# Altium PCB 333.PcbDoc (part 3 of 4)
Units mil, origin at the board's own origin, x right, y up, seen from the top; angles counter-clockwise.
Board outline 3897.64 x 5283.46 mil, 2 copper layers (Top Layer, Bottom Layer); 160 components, 17 nets, 480 pads, 300 vias.
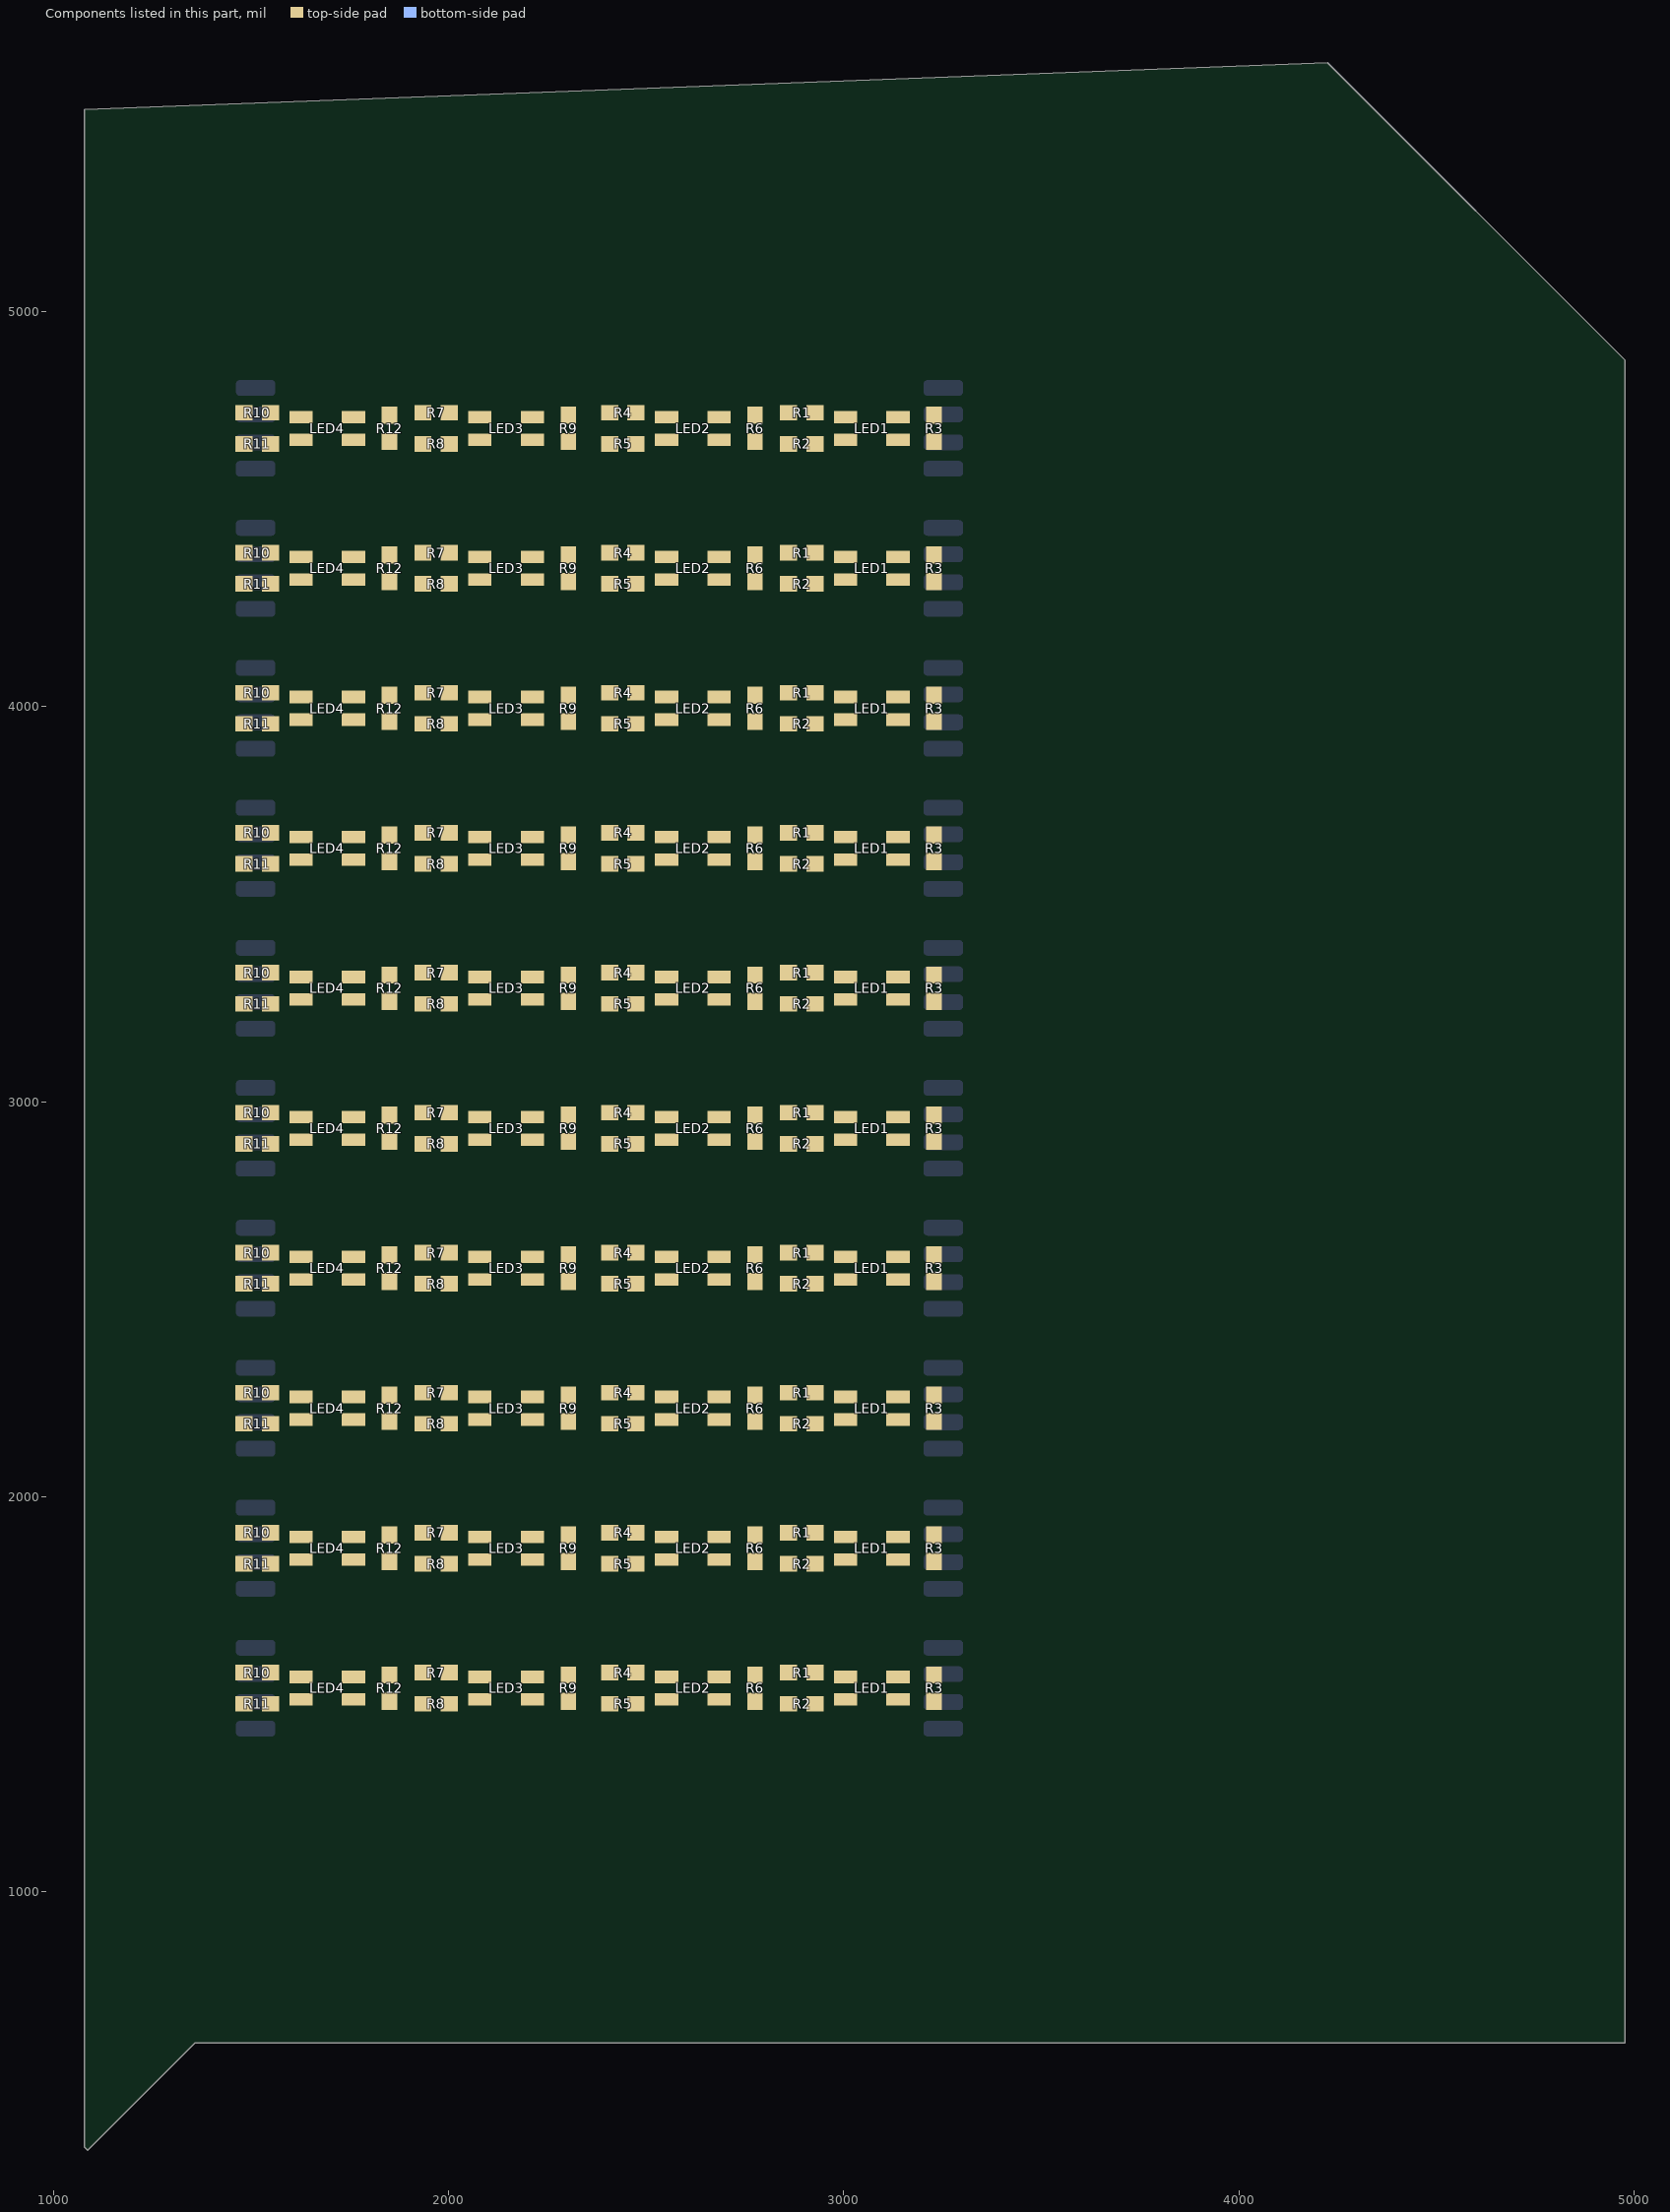
[diagram p3: the components of this part, seen from the top]

## Via types
v1: diameter 24, hole 12, Top Layer to Bottom Layer, 160 vias
v2: diameter 15, hole 15, Top Layer to Bottom Layer, 140 vias

## Nets (pads, with @x,y where several pads share a name; then routed paths per layer and width w, separated by ;. In a path a pad name is that pad's centre, name@x,y a point inside that pad or via, vN(x,y) a via of type N, cw(c..) or ccw(c..) an arc to the next point about the centre after c; other vN are vias at no path point) (continued)
copper on no net: (continued)
  Top Layer w15: 1798.23,3613.19 1811.02,3625.98 1811.02,3665.35 1820.87,3675.2 ; 1798.23,3967.52 1811.02,3980.31 1811.02,4019.68 1820.87,4029.53 ; 1798.23,4321.85 1811.02,4334.65 1811.02,4374.02 1820.87,4383.86 ; 1798.23,4676.18 1811.02,4688.98 1811.02,4728.35 1820.87,4738.19 ; 1850.39,1482.28 1875.98,1482.28 ; 1850.39,1482.28 1875.98,1482.28 ; 1850.39,1482.28 v1(1889.76,1486.22) ; 1850.39,1482.28 v1(1889.76,1486.22) ; 1850.39,2190.94 v1(1889.76,2194.88) ; 1850.39,2190.94 v1(1889.76,2194.88) ; 1850.39,2190.94 1875.98,2190.94 ; 1850.39,2190.94 1875.98,2190.94 ; 1850.39,2545.28 1875.98,2545.28 ; 1850.39,2545.28 1875.98,2545.28 ; 1850.39,2545.28 v1(1889.76,2549.21) ; 1850.39,2545.28 v1(1889.76,2549.21) ; 1850.39,2899.61 v1(1889.76,2903.54) ; 1850.39,2899.61 v1(1889.76,2903.54) ; 1850.39,2899.61 1875.98,2899.61 ; 1850.39,2899.61 1875.98,2899.61 ; 1850.39,3253.94 1875.98,3253.94 ; 1850.39,3253.94 1875.98,3253.94 ; 1850.39,3253.94 v1(1889.76,3257.87) ; 1850.39,3253.94 v1(1889.76,3257.87) ; 1850.39,3608.27 1875.98,3608.27 ; 1850.39,3608.27 1875.98,3608.27 ; 1850.39,3608.27 v1(1889.76,3612.2) ; 1850.39,3608.27 v1(1889.76,3612.2) ; 1850.39,3962.6 v1(1889.76,3966.54) ; 1850.39,3962.6 v1(1889.76,3966.54) ; 1850.39,3962.6 1875.98,3962.6 ; 1850.39,3962.6 1875.98,3962.6 ; 1850.39,4316.93 v1(1889.76,4320.87) ; 1850.39,4316.93 v1(1889.76,4320.87) ; 1850.39,4316.93 1875.98,4316.93 ; 1850.39,4316.93 1875.98,4316.93 ; 1850.39,4671.26 1875.98,4671.26 ; 1850.39,4671.26 1875.98,4671.26 ; 1850.39,4671.26 v1(1889.76,4675.2) ; 1850.39,4671.26 v1(1889.76,4675.2) ; 1853.29,1470.45 1875.98,1482.28 ; 1853.29,1470.45 1875.98,1482.28 ; 1853.29,1470.45 v1(1889.76,1486.22) ; 1853.29,1470.45 v1(1889.76,1486.22) ; 1853.29,1494.12 1875.98,1482.28 ; 1853.29,1494.12 1875.98,1482.28 ; 1853.29,1494.12 v1(1889.76,1486.22) ; 1853.29,1494.12 v1(1889.76,1486.22) ; 1853.29,2179.11 v1(1889.76,2194.88) ; 1853.29,2179.11 v1(1889.76,2194.88) ; 1853.29,2179.11 1875.98,2190.94 ; 1853.29,2179.11 1875.98,2190.94 ; 1853.29,2202.78 v1(1889.76,2194.88) ; 1853.29,2202.78 v1(1889.76,2194.88) ; 1853.29,2202.78 1875.98,2190.94 ; 1853.29,2202.78 1875.98,2190.94 ; 1853.29,2533.44 1875.98,2545.28 ; 1853.29,2533.44 1875.98,2545.28 ; 1853.29,2533.44 v1(1889.76,2549.21) ; 1853.29,2533.44 v1(1889.76,2549.21) ; 1853.29,2557.11 1875.98,2545.28 ; 1853.29,2557.11 1875.98,2545.28 ; 1853.29,2557.11 v1(1889.76,2549.21) ; 1853.29,2557.11 v1(1889.76,2549.21) ; 1853.29,2887.77 v1(1889.76,2903.54) ; 1853.29,2887.77 v1(1889.76,2903.54) ; 1853.29,2887.77 1875.98,2899.61 ; 1853.29,2887.77 1875.98,2899.61 ; 1853.29,2911.44 v1(1889.76,2903.54) ; 1853.29,2911.44 v1(1889.76,2903.54) ; 1853.29,2911.44 1875.98,2899.61 ; 1853.29,2911.44 1875.98,2899.61 ; 1853.29,3242.1 1875.98,3253.94 ; 1853.29,3242.1 1875.98,3253.94 ; 1853.29,3242.1 v1(1889.76,3257.87) ; 1853.29,3242.1 v1(1889.76,3257.87) ; 1853.29,3265.77 1875.98,3253.94 ; 1853.29,3265.77 1875.98,3253.94 ; 1853.29,3265.77 v1(1889.76,3257.87) ; 1853.29,3265.77 v1(1889.76,3257.87) ; 1853.29,3596.43 1875.98,3608.27 ; 1853.29,3596.43 1875.98,3608.27 ; 1853.29,3596.43 v1(1889.76,3612.2) ; 1853.29,3596.43 v1(1889.76,3612.2) ; 1853.29,3620.1 1875.98,3608.27 ; 1853.29,3620.1 1875.98,3608.27 ; 1853.29,3620.1 v1(1889.76,3612.2) ; 1853.29,3620.1 v1(1889.76,3612.2) ; 1853.29,3950.76 v1(1889.76,3966.54) ; 1853.29,3950.76 v1(1889.76,3966.54) ; 1853.29,3950.76 1875.98,3962.6 ; 1853.29,3950.76 1875.98,3962.6 ; 1853.29,3974.43 v1(1889.76,3966.54) ; 1853.29,3974.43 v1(1889.76,3966.54) ; 1853.29,3974.43 1875.98,3962.6 ; 1853.29,3974.43 1875.98,3962.6 ; 1853.29,4305.09 v1(1889.76,4320.87) ; 1853.29,4305.09 v1(1889.76,4320.87) ; 1853.29,4305.09 1875.98,4316.93 ; 1853.29,4305.09 1875.98,4316.93 ; 1853.29,4328.76 v1(1889.76,4320.87) ; 1853.29,4328.76 v1(1889.76,4320.87) ; 1853.29,4328.76 1875.98,4316.93 ; 1853.29,4328.76 1875.98,4316.93 ; 1853.29,4659.43 1875.98,4671.26 ; 1853.29,4659.43 1875.98,4671.26 ; 1853.29,4659.43 v1(1889.76,4675.2) ; 1853.29,4659.43 v1(1889.76,4675.2) ; 1853.29,4683.09 1875.98,4671.26 ; 1853.29,4683.09 1875.98,4671.26 ; 1853.29,4683.09 v1(1889.76,4675.2) ; 1853.29,4683.09 v1(1889.76,4675.2) ; 1875.98,1482.28 v1@1879.92,1486.22 ; 1875.98,1482.28 v1(1889.76,1486.22) ; 1875.98,1482.28 v1(1889.76,1486.22) ; 1875.98,1482.28 v1(1889.76,1486.22) ; 1875.98,1482.28 v1(1889.76,1486.22) ; 1875.98,1482.28 v1(1889.76,1486.22) ; 1875.98,1482.28 v1(1889.76,1486.22) ; 1875.98,1482.28 v1(1889.76,1486.22) ; 1875.98,2190.94 v1(1889.76,2194.88) ; 1875.98,2190.94 v1(1889.76,2194.88) ; 1875.98,2190.94 v1(1889.76,2194.88) ; 1875.98,2190.94 v1(1889.76,2194.88) ; 1875.98,2190.94 v1(1889.76,2194.88) ; 1875.98,2190.94 v1(1889.76,2194.88) ; 1875.98,2190.94 v1(1889.76,2194.88) ; 1875.98,2190.94 v1@1879.92,2194.88 ; 1875.98,2545.28 v1@1879.92,2549.21 ; 1875.98,2545.28 v1(1889.76,2549.21) ; 1875.98,2545.28 v1(1889.76,2549.21) ; 1875.98,2545.28 v1(1889.76,2549.21) ; 1875.98,2545.28 v1(1889.76,2549.21) ; 1875.98,2545.28 v1(1889.76,2549.21) ; 1875.98,2545.28 v1(1889.76,2549.21) ; 1875.98,2545.28 v1(1889.76,2549.21) ; 1875.98,2899.61 v1(1889.76,2903.54) ; 1875.98,2899.61 v1(1889.76,2903.54) ; 1875.98,2899.61 v1(1889.76,2903.54) ; 1875.98,2899.61 v1(1889.76,2903.54) ; 1875.98,2899.61 v1(1889.76,2903.54) ; 1875.98,2899.61 v1(1889.76,2903.54) ; 1875.98,2899.61 v1(1889.76,2903.54) ; 1875.98,2899.61 v1@1879.92,2903.54 ; 1875.98,3253.94 v1@1879.92,3257.87 ; 1875.98,3253.94 v1(1889.76,3257.87) ; 1875.98,3253.94 v1(1889.76,3257.87) ; 1875.98,3253.94 v1(1889.76,3257.87) ; 1875.98,3253.94 v1(1889.76,3257.87) ; 1875.98,3253.94 v1(1889.76,3257.87) ; 1875.98,3253.94 v1(1889.76,3257.87) ; 1875.98,3253.94 v1(1889.76,3257.87) ; 1875.98,3608.27 v1@1879.92,3612.2 ; 1875.98,3608.27 v1(1889.76,3612.2) ; 1875.98,3608.27 v1(1889.76,3612.2) ; 1875.98,3608.27 v1(1889.76,3612.2) ; 1875.98,3608.27 v1(1889.76,3612.2) ; 1875.98,3608.27 v1(1889.76,3612.2) ; 1875.98,3608.27 v1(1889.76,3612.2) ; 1875.98,3608.27 v1(1889.76,3612.2) ; 1875.98,3962.6 v1(1889.76,3966.54) ; 1875.98,3962.6 v1(1889.76,3966.54) ; 1875.98,3962.6 v1(1889.76,3966.54) ; 1875.98,3962.6 v1(1889.76,3966.54) ; 1875.98,3962.6 v1(1889.76,3966.54) ; 1875.98,3962.6 v1(1889.76,3966.54) ; 1875.98,3962.6 v1(1889.76,3966.54) ; 1875.98,3962.6 v1@1879.92,3966.54 ; 1875.98,4316.93 v1(1889.76,4320.87) ; 1875.98,4316.93 v1(1889.76,4320.87) ; 1875.98,4316.93 v1(1889.76,4320.87) ; 1875.98,4316.93 v1(1889.76,4320.87) ; 1875.98,4316.93 v1(1889.76,4320.87) ; 1875.98,4316.93 v1(1889.76,4320.87) ; 1875.98,4316.93 v1(1889.76,4320.87) ; 1875.98,4316.93 v1@1879.92,4320.87 ; 1875.98,4671.26 v1@1879.92,4675.2 ; 1875.98,4671.26 v1(1889.76,4675.2) ; 1875.98,4671.26 v1(1889.76,4675.2) ; 1875.98,4671.26 v1(1889.76,4675.2) ; 1875.98,4671.26 v1(1889.76,4675.2) ; 1875.98,4671.26 v1(1889.76,4675.2) ; 1875.98,4671.26 v1(1889.76,4675.2) ; 1875.98,4671.26 v1(1889.76,4675.2) ; v1@1879.92,1486.22 v1(1889.76,1486.22) ; v1@1879.92,1486.22 1852.1,1496.32 v1(1889.76,1486.22) ; v1@1879.92,1486.22 1853.69,1472.52 v1(1889.76,1486.22) ; v1@1879.92,1486.22 1850.39,1484.25 v1(1889.76,1486.22) ; v1@1879.92,2194.88 1850.39,2192.91 v1(1889.76,2194.88) ; v1@1879.92,2194.88 1853.69,2181.18 v1(1889.76,2194.88) ; v1@1879.92,2194.88 1852.1,2204.98 v1(1889.76,2194.88) ; v1@1879.92,2194.88 v1(1889.76,2194.88) ; v1@1879.92,2549.21 v1(1889.76,2549.21) ; v1@1879.92,2549.21 1852.1,2559.31 v1(1889.76,2549.21) ; v1@1879.92,2549.21 1853.69,2535.51 v1(1889.76,2549.21) ; v1@1879.92,2549.21 1850.39,2547.24 v1(1889.76,2549.21) ; v1@1879.92,2903.54 1850.39,2901.57 v1(1889.76,2903.54) ; v1@1879.92,2903.54 1853.69,2889.84 v1(1889.76,2903.54) ; v1@1879.92,2903.54 1852.1,2913.64 v1(1889.76,2903.54) ; v1@1879.92,2903.54 v1(1889.76,2903.54) ; v1@1879.92,3257.87 v1(1889.76,3257.87) ; v1@1879.92,3257.87 1852.1,3267.97 v1(1889.76,3257.87) ; v1@1879.92,3257.87 1853.69,3244.17 v1(1889.76,3257.87) ; v1@1879.92,3257.87 1850.39,3255.91 v1(1889.76,3257.87) ; v1@1879.92,3612.2 v1(1889.76,3612.2) ; v1@1879.92,3612.2 1852.1,3622.3 v1(1889.76,3612.2) ; v1@1879.92,3612.2 1853.69,3598.51 v1(1889.76,3612.2) ; v1@1879.92,3612.2 1850.39,3610.24 v1(1889.76,3612.2) ; v1@1879.92,3966.54 1850.39,3964.57 v1(1889.76,3966.54) ; v1@1879.92,3966.54 1853.69,3952.84 v1(1889.76,3966.54) ; v1@1879.92,3966.54 1852.1,3976.63 v1(1889.76,3966.54) ; v1@1879.92,3966.54 v1(1889.76,3966.54) ; v1@1879.92,4320.87 1850.39,4318.9 v1(1889.76,4320.87) ; v1@1879.92,4320.87 1853.69,4307.17 v1(1889.76,4320.87) ; v1@1879.92,4320.87 1852.1,4330.96 v1(1889.76,4320.87) ; v1@1879.92,4320.87 v1(1889.76,4320.87) ; v1@1879.92,4675.2 v1(1889.76,4675.2) ; v1@1879.92,4675.2 1852.1,4685.29 v1(1889.76,4675.2) ; v1@1879.92,4675.2 1853.69,4661.5 v1(1889.76,4675.2) ; v1@1879.92,4675.2 1850.39,4673.23 v1(1889.76,4675.2) ; 2003.94,1476.38 2038.39,1487.2 ; 2003.94,1476.38 2027.56,1476.38 ; 2003.94,1476.38 2027.56,1476.38 ; 2003.94,1555.12 2038.39,1544.29 ; 2003.94,1555.12 2027.56,1555.12 ; 2003.94,1555.12 2027.56,1555.12 ; 2003.94,2185.04 2027.56,2185.04 ; 2003.94,2185.04 2027.56,2185.04 ; 2003.94,2185.04 2038.39,2195.87 ; 2003.94,2263.78 2027.56,2263.78 ; 2003.94,2263.78 2027.56,2263.78 ; 2003.94,2263.78 2038.39,2252.95 ; 2003.94,2539.37 2038.39,2550.2 ; 2003.94,2539.37 2027.56,2539.37 ; 2003.94,2539.37 2027.56,2539.37 ; 2003.94,2618.11 2038.39,2607.28 ; 2003.94,2618.11 2027.56,2618.11 ; 2003.94,2618.11 2027.56,2618.11 ; 2003.94,2893.7 2027.56,2893.7 ; 2003.94,2893.7 2027.56,2893.7 ; 2003.94,2893.7 2038.39,2904.53 ; 2003.94,2972.44 2027.56,2972.44 ; 2003.94,2972.44 2027.56,2972.44 ; 2003.94,2972.44 2038.39,2961.61 ; 2003.94,3248.03 2038.39,3258.86 ; 2003.94,3248.03 2027.56,3248.03 ; 2003.94,3248.03 2027.56,3248.03 ; 2003.94,3326.77 2038.39,3315.94 ; 2003.94,3326.77 2027.56,3326.77 ; 2003.94,3326.77 2027.56,3326.77 ; 2003.94,3602.36 2038.39,3613.19 ; 2003.94,3602.36 2027.56,3602.36 ; 2003.94,3602.36 2027.56,3602.36 ; 2003.94,3681.1 2038.39,3670.28 ; 2003.94,3681.1 2027.56,3681.1 ; 2003.94,3681.1 2027.56,3681.1 ; 2003.94,3956.69 2027.56,3956.69 ; 2003.94,3956.69 2027.56,3956.69 ; 2003.94,3956.69 2038.39,3967.52 ; 2003.94,4035.43 2027.56,4035.43 ; 2003.94,4035.43 2027.56,4035.43 ; 2003.94,4035.43 2038.39,4024.61 ; 2003.94,4311.02 2027.56,4311.02 ; 2003.94,4311.02 2027.56,4311.02 ; 2003.94,4311.02 2038.39,4321.85 ; 2003.94,4389.76 2027.56,4389.76 ; 2003.94,4389.76 2027.56,4389.76 ; 2003.94,4389.76 2038.39,4378.94 ; 2003.94,4665.35 2038.39,4676.18 ; 2003.94,4665.35 2027.56,4665.35 ; 2003.94,4665.35 2027.56,4665.35 ; 2003.94,4744.09 2038.39,4733.27 ; 2003.94,4744.09 2027.56,4744.09 ; 2003.94,4744.09 2027.56,4744.09 ; 2027.56,1476.38 2038.39,1487.2 ; 2027.56,1476.38 2007.08,1488.15 2027.56,1476.38 ; 2027.56,1476.38 2007.08,1464.61 2027.56,1476.38 ; 2027.56,1555.12 2038.39,1544.29 ; 2027.56,1555.12 2007.08,1566.89 2027.56,1555.12 ; 2027.56,1555.12 2007.08,1543.35 2027.56,1555.12 ; 2027.56,2185.04 2007.08,2173.27 2027.56,2185.04 ; 2027.56,2185.04 2007.08,2196.81 2027.56,2185.04 ; 2027.56,2185.04 2038.39,2195.87 ; 2027.56,2263.78 2007.08,2252.01 2027.56,2263.78 ; 2027.56,2263.78 2007.08,2275.55 2027.56,2263.78 ; 2027.56,2263.78 2038.39,2252.95 ; 2027.56,2539.37 2038.39,2550.2 ; 2027.56,2539.37 2007.08,2551.14 2027.56,2539.37 ; 2027.56,2539.37 2007.08,2527.6 2027.56,2539.37 ; 2027.56,2618.11 2038.39,2607.28 ; 2027.56,2618.11 2007.08,2629.88 2027.56,2618.11 ; 2027.56,2618.11 2007.08,2606.34 2027.56,2618.11 ; 2027.56,2893.7 2007.08,2881.93 2027.56,2893.7 ; 2027.56,2893.7 2007.08,2905.47 2027.56,2893.7 ; 2027.56,2893.7 2038.39,2904.53 ; 2027.56,2972.44 2007.08,2960.67 2027.56,2972.44 ; 2027.56,2972.44 2007.08,2984.21 2027.56,2972.44 ; 2027.56,2972.44 2038.39,2961.61 ; 2027.56,3248.03 2038.39,3258.86 ; 2027.56,3248.03 2007.08,3259.8 2027.56,3248.03 ; 2027.56,3248.03 2007.08,3236.26 2027.56,3248.03 ; 2027.56,3326.77 2038.39,3315.94 ; 2027.56,3326.77 2007.08,3338.54 2027.56,3326.77 ; 2027.56,3326.77 2007.08,3315 2027.56,3326.77 ; 2027.56,3602.36 2038.39,3613.19 ; 2027.56,3602.36 2007.08,3614.14 2027.56,3602.36 ; 2027.56,3602.36 2007.08,3590.59 2027.56,3602.36 ; 2027.56,3681.1 2038.39,3670.28 ; 2027.56,3681.1 2007.08,3692.88 2027.56,3681.1 ; 2027.56,3681.1 2007.08,3669.33 2027.56,3681.1 ; 2027.56,3956.69 2007.08,3944.92 2027.56,3956.69 ; 2027.56,3956.69 2007.08,3968.47 2027.56,3956.69 ; 2027.56,3956.69 2038.39,3967.52 ; 2027.56,4035.43 2007.08,4023.66 2027.56,4035.43 ; 2027.56,4035.43 2007.08,4047.21 2027.56,4035.43 ; 2027.56,4035.43 2038.39,4024.61 ; 2027.56,4311.02 2007.08,4299.25 2027.56,4311.02 ; 2027.56,4311.02 2007.08,4322.8 2027.56,4311.02 ; 2027.56,4311.02 2038.39,4321.85 ; 2027.56,4389.76 2007.08,4377.99 2027.56,4389.76 ; 2027.56,4389.76 2007.08,4401.54 2027.56,4389.76 ; 2027.56,4389.76 2038.39,4378.94 ; 2027.56,4665.35 2038.39,4676.18 ; 2027.56,4665.35 2007.08,4677.13 2027.56,4665.35 ; 2027.56,4665.35 2007.08,4653.58 2027.56,4665.35 ; 2027.56,4744.09 2038.39,4733.27 ; 2027.56,4744.09 2007.08,4755.87 2027.56,4744.09 ; 2027.56,4744.09 2007.08,4732.32 2027.56,4744.09 ; 2250.98,1487.2 2263.78,1500 2263.78,1539.37 2273.62,1549.21 ; 2250.98,2195.87 2263.78,2208.66 2263.78,2248.03 2273.62,2257.87 ; 2250.98,2550.2 2263.78,2562.99 2263.78,2602.36 2273.62,2612.2 ; 2250.98,2904.53 2263.78,2917.32 2263.78,2956.69 2273.62,2966.54 ; 2250.98,3258.86 2263.78,3271.65 2263.78,3311.02 2273.62,3320.87 ; 2250.98,3613.19 2263.78,3625.98 2263.78,3665.35 2273.62,3675.2 ; 2250.98,3967.52 2263.78,3980.31 2263.78,4019.68 2273.62,4029.53 ; 2250.98,4321.85 2263.78,4334.65 2263.78,4374.02 2273.62,4383.86 ; 2250.98,4676.18 2263.78,4688.98 2263.78,4728.35 2273.62,4738.19 ; 2328.74,1482.28 2303.15,1482.28 v1(2342.52,1486.22) ; 2328.74,1482.28 2306.05,1494.12 v1(2342.52,1486.22) ; 2328.74,1482.28 2306.05,1470.45 v1(2342.52,1486.22) ; 2328.74,1482.28 v1(2342.52,1486.22) ; 2328.74,1482.28 v1(2342.52,1486.22) ; 2328.74,1482.28 v1(2342.52,1486.22) ; 2328.74,2190.94 v1(2342.52,2194.88) ; 2328.74,2190.94 v1(2342.52,2194.88) ; 2328.74,2190.94 v1(2342.52,2194.88) ; 2328.74,2190.94 2306.05,2179.11 v1(2342.52,2194.88) ; 2328.74,2190.94 2306.05,2202.78 v1(2342.52,2194.88) ; 2328.74,2190.94 2303.15,2190.94 v1(2342.52,2194.88) ; 2328.74,2545.28 2303.15,2545.28 v1(2342.52,2549.21) ; 2328.74,2545.28 2306.05,2557.11 v1(2342.52,2549.21) ; 2328.74,2545.28 2306.05,2533.44 v1(2342.52,2549.21) ; 2328.74,2545.28 v1(2342.52,2549.21) ; 2328.74,2545.28 v1(2342.52,2549.21) ; 2328.74,2545.28 v1(2342.52,2549.21) ; 2328.74,2899.61 v1(2342.52,2903.54) ; 2328.74,2899.61 v1(2342.52,2903.54) ; 2328.74,2899.61 v1(2342.52,2903.54) ; 2328.74,2899.61 2306.05,2887.77 v1(2342.52,2903.54) ; 2328.74,2899.61 2306.05,2911.44 v1(2342.52,2903.54) ; 2328.74,2899.61 2303.15,2899.61 v1(2342.52,2903.54) ; 2328.74,3253.94 2303.15,3253.94 v1(2342.52,3257.87) ; 2328.74,3253.94 2306.05,3265.77 v1(2342.52,3257.87) ; 2328.74,3253.94 2306.05,3242.1 v1(2342.52,3257.87) ; 2328.74,3253.94 v1(2342.52,3257.87) ; 2328.74,3253.94 v1(2342.52,3257.87) ; 2328.74,3253.94 v1(2342.52,3257.87) ; 2328.74,3608.27 2303.15,3608.27 v1(2342.52,3612.2) ; 2328.74,3608.27 2306.05,3620.1 v1(2342.52,3612.2) ; 2328.74,3608.27 2306.05,3596.43 v1(2342.52,3612.2) ; 2328.74,3608.27 v1(2342.52,3612.2) ; 2328.74,3608.27 v1(2342.52,3612.2) ; 2328.74,3608.27 v1(2342.52,3612.2) ; 2328.74,3962.6 v1(2342.52,3966.54) ; 2328.74,3962.6 v1(2342.52,3966.54) ; 2328.74,3962.6 v1(2342.52,3966.54) ; 2328.74,3962.6 2306.05,3950.76 v1(2342.52,3966.54) ; 2328.74,3962.6 2306.05,3974.43 v1(2342.52,3966.54) ; 2328.74,3962.6 2303.15,3962.6 v1(2342.52,3966.54) ; 2328.74,4316.93 v1(2342.52,4320.87) ; 2328.74,4316.93 v1(2342.52,4320.87) ; 2328.74,4316.93 v1(2342.52,4320.87) ; 2328.74,4316.93 2306.05,4305.09 v1(2342.52,4320.87) ; 2328.74,4316.93 2306.05,4328.76 v1(2342.52,4320.87) ; 2328.74,4316.93 2303.15,4316.93 v1(2342.52,4320.87) ; 2328.74,4671.26 2303.15,4671.26 v1(2342.52,4675.2) ; 2328.74,4671.26 2306.05,4683.09 v1(2342.52,4675.2) ; 2328.74,4671.26 2306.05,4659.43 v1(2342.52,4675.2) ; 2328.74,4671.26 v1(2342.52,4675.2) ; 2328.74,4671.26 v1(2342.52,4675.2) ; 2328.74,4671.26 v1(2342.52,4675.2) ; 2476.38,1476.38 2510.83,1487.2 ; 2476.38,1476.38 2500,1476.38 ; 2476.38,1476.38 2500,1476.38 ; 2476.38,1555.12 2510.83,1544.29 ; 2476.38,1555.12 2500,1555.12 ; 2476.38,1555.12 2500,1555.12 ; 2476.38,2185.04 2500,2185.04 ; 2476.38,2185.04 2500,2185.04 ; 2476.38,2185.04 2510.83,2195.87 ; 2476.38,2263.78 2500,2263.78 ; 2476.38,2263.78 2500,2263.78 ; 2476.38,2263.78 2510.83,2252.95 ; 2476.38,2539.37 2510.83,2550.2 ; 2476.38,2539.37 2500,2539.37 ; 2476.38,2539.37 2500,2539.37 ; 2476.38,2618.11 2510.83,2607.28 ; 2476.38,2618.11 2500,2618.11 ; 2476.38,2618.11 2500,2618.11 ; 2476.38,2893.7 2500,2893.7 ; 2476.38,2893.7 2500,2893.7 ; 2476.38,2893.7 2510.83,2904.53 ; 2476.38,2972.44 2500,2972.44 ; 2476.38,2972.44 2500,2972.44 ; 2476.38,2972.44 2510.83,2961.61 ; 2476.38,3248.03 2510.83,3258.86 ; 2476.38,3248.03 2500,3248.03 ; 2476.38,3248.03 2500,3248.03 ; 2476.38,3326.77 2510.83,3315.94 ; 2476.38,3326.77 2500,3326.77 ; 2476.38,3326.77 2500,3326.77 ; 2476.38,3602.36 2510.83,3613.19 ; 2476.38,3602.36 2500,3602.36 ; 2476.38,3602.36 2500,3602.36 ; 2476.38,3681.1 2510.83,3670.28 ; 2476.38,3681.1 2500,3681.1 ; 2476.38,3681.1 2500,3681.1 ; 2476.38,3956.69 2500,3956.69 ; 2476.38,3956.69 2500,3956.69 ; 2476.38,3956.69 2510.83,3967.52 ; 2476.38,4035.43 2500,4035.43 ; 2476.38,4035.43 2500,4035.43 ; 2476.38,4035.43 2510.83,4024.61 ; 2476.38,4311.02 2500,4311.02 ; 2476.38,4311.02 2500,4311.02 ; 2476.38,4311.02 2510.83,4321.85 ; 2476.38,4389.76 2500,4389.76 ; 2476.38,4389.76 2500,4389.76 ; 2476.38,4389.76 2510.83,4378.94 ; 2476.38,4665.35 2510.83,4676.18 ; 2476.38,4665.35 2500,4665.35 ; 2476.38,4665.35 2500,4665.35 ; 2476.38,4744.09 2510.83,4733.27 ; 2476.38,4744.09 2500,4744.09 ; 2476.38,4744.09 2500,4744.09 ; 2500,1476.38 2510.83,1487.2 ; 2500,1476.38 2479.52,1488.15 2500,1476.38 ; 2500,1476.38 2479.52,1464.61 2500,1476.38 ; 2500,1555.12 2510.83,1544.29 ; 2500,1555.12 2479.52,1566.89 2500,1555.12 ; 2500,1555.12 2479.52,1543.35 2500,1555.12 ; 2500,2185.04 2479.52,2173.27 2500,2185.04 ; 2500,2185.04 2479.52,2196.81 2500,2185.04 ; 2500,2185.04 2510.83,2195.87 ; 2500,2263.78 2479.52,2252.01 2500,2263.78 ; 2500,2263.78 2479.52,2275.55 2500,2263.78 ; 2500,2263.78 2510.83,2252.95 ; 2500,2539.37 2510.83,2550.2 ; 2500,2539.37 2479.52,2551.14 2500,2539.37 ; 2500,2539.37 2479.52,2527.6 2500,2539.37 ; 2500,2618.11 2510.83,2607.28 ; 2500,2618.11 2479.52,2629.88 2500,2618.11 ; 2500,2618.11 2479.52,2606.34 2500,2618.11 ; 2500,2893.7 2479.52,2881.93 2500,2893.7 ; 2500,2893.7 2479.52,2905.47 2500,2893.7 ; 2500,2893.7 2510.83,2904.53 ; 2500,2972.44 2479.52,2960.67 2500,2972.44 ; 2500,2972.44 2479.52,2984.21 2500,2972.44 ; 2500,2972.44 2510.83,2961.61 ; 2500,3248.03 2510.83,3258.86 ; 2500,3248.03 2479.52,3259.8 2500,3248.03 ; 2500,3248.03 2479.52,3236.26 2500,3248.03 ; 2500,3326.77 2510.83,3315.94 ; 2500,3326.77 2479.52,3338.54 2500,3326.77 ; 2500,3326.77 2479.52,3315 2500,3326.77 ; 2500,3602.36 2510.83,3613.19 ; 2500,3602.36 2479.52,3614.13 2500,3602.36 ; 2500,3602.36 2479.52,3590.59 2500,3602.36 ; 2500,3681.1 2510.83,3670.28 ; 2500,3681.1 2479.52,3692.88 2500,3681.1 ; 2500,3681.1 2479.52,3669.33 2500,3681.1 ; 2500,3956.69 2479.52,3944.92 2500,3956.69 ; 2500,3956.69 2479.52,3968.47 2500,3956.69 ; 2500,3956.69 2510.83,3967.52 ; 2500,4035.43 2479.52,4023.66 2500,4035.43 ; 2500,4035.43 2479.52,4047.21 2500,4035.43 ; 2500,4035.43 2510.83,4024.61 ; 2500,4311.02 2479.52,4299.25 2500,4311.02 ; 2500,4311.02 2479.52,4322.8 2500,4311.02 ; 2500,4311.02 2510.83,4321.85 ; 2500,4389.76 2479.52,4377.99 2500,4389.76 ; 2500,4389.76 2479.52,4401.54 2500,4389.76 ; 2500,4389.76 2510.83,4378.94 ; 2500,4665.35 2510.83,4676.18 ; 2500,4665.35 2479.52,4677.13 2500,4665.35 ; 2500,4665.35 2479.52,4653.58 2500,4665.35 ; 2500,4744.09 2510.83,4733.27 ; 2500,4744.09 2479.52,4755.87 2500,4744.09 ; 2500,4744.09 2479.52,4732.32 2500,4744.09 ; 2723.43,1487.2 2736.22,1500 2736.22,1539.37 2746.06,1549.21 ; 2723.43,2195.87 2736.22,2208.66 2736.22,2248.03 2746.06,2257.87 ; 2723.43,2550.2 2736.22,2562.99 2736.22,2602.36 2746.06,2612.2 ; 2723.43,2904.53 2736.22,2917.32 2736.22,2956.69 2746.06,2966.54 ; 2723.43,3258.86 2736.22,3271.65 2736.22,3311.02 2746.06,3320.87 ; 2723.43,3613.19 2736.22,3625.98 2736.22,3665.35 2746.06,3675.2 ; 2723.43,3967.52 2736.22,3980.31 2736.22,4019.68 2746.06,4029.53 ; 2723.43,4321.85 2736.22,4334.65 2736.22,4374.02 2746.06,4383.86 ; 2723.43,4676.18 2736.22,4688.98 2736.22,4728.35 2746.06,4738.19 ; 2746.06,1549.21 2775.59,1549.21 2746.06,1549.21 ; 2746.06,2257.87 2775.59,2257.87 2746.06,2257.87 ; 2746.06,2612.2 2775.59,2612.2 2746.06,2612.2 ; 2746.06,2966.54 2775.59,2966.54 2746.06,2966.54 ; 2746.06,3320.87 2775.59,3320.87 2746.06,3320.87 ; 2746.06,3675.2 2775.59,3675.2 2746.06,3675.2 ; 2746.06,4029.53 2775.59,4029.53 2746.06,4029.53 ; 2746.06,4383.86 2775.59,4383.86 2746.06,4383.86 ; 2746.06,4738.19 2775.59,4738.19 2746.06,4738.19 ; 2801.18,1482.28 2775.59,1482.28 v1(2814.96,1486.22) ; 2801.18,1482.28 2778.49,1494.12 v1(2814.96,1486.22) ; 2801.18,1482.28 2778.49,1470.45 v1(2814.96,1486.22) ; 2801.18,1482.28 v1(2814.96,1486.22) ; 2801.18,1482.28 v1(2814.96,1486.22) ; 2801.18,1482.28 v1(2814.96,1486.22) ; 2801.18,2190.94 v1(2814.96,2194.88) ; 2801.18,2190.94 v1(2814.96,2194.88) ; 2801.18,2190.94 v1(2814.96,2194.88) ; 2801.18,2190.94 2778.49,2179.11 v1(2814.96,2194.88) ; 2801.18,2190.94 2778.49,2202.78 v1(2814.96,2194.88) ; 2801.18,2190.94 2775.59,2190.94 v1(2814.96,2194.88) ; 2801.18,2545.28 2775.59,2545.28 v1(2814.96,2549.21) ; 2801.18,2545.28 2778.49,2557.11 v1(2814.96,2549.21) ; 2801.18,2545.28 2778.49,2533.44 v1(2814.96,2549.21) ; 2801.18,2545.28 v1(2814.96,2549.21) ; 2801.18,2545.28 v1(2814.96,2549.21) ; 2801.18,2545.28 v1(2814.96,2549.21) ; 2801.18,2899.61 v1(2814.96,2903.54) ; 2801.18,2899.61 v1(2814.96,2903.54) ; 2801.18,2899.61 v1(2814.96,2903.54) ; 2801.18,2899.61 2778.49,2887.77 v1(2814.96,2903.54) ; 2801.18,2899.61 2778.49,2911.44 v1(2814.96,2903.54) ; 2801.18,2899.61 2775.59,2899.61 v1(2814.96,2903.54) ; 2801.18,3253.94 2775.59,3253.94 v1(2814.96,3257.87) ; 2801.18,3253.94 2778.49,3265.77 v1(2814.96,3257.87) ; 2801.18,3253.94 2778.49,3242.1 v1(2814.96,3257.87) ; 2801.18,3253.94 v1(2814.96,3257.87) ; 2801.18,3253.94 v1(2814.96,3257.87) ; 2801.18,3253.94 v1(2814.96,3257.87) ; 2801.18,3608.27 2775.59,3608.27 v1(2814.96,3612.2) ; 2801.18,3608.27 2778.49,3620.1 v1(2814.96,3612.2) ; 2801.18,3608.27 2778.49,3596.43 v1(2814.96,3612.2) ; 2801.18,3608.27 v1(2814.96,3612.2) ; 2801.18,3608.27 v1(2814.96,3612.2) ; 2801.18,3608.27 v1(2814.96,3612.2) ; 2801.18,3962.6 v1(2814.96,3966.54) ; 2801.18,3962.6 v1(2814.96,3966.54) ; 2801.18,3962.6 v1(2814.96,3966.54) ; 2801.18,3962.6 2778.49,3950.76 v1(2814.96,3966.54) ; 2801.18,3962.6 2778.49,3974.43 v1(2814.96,3966.54) ; 2801.18,3962.6 2775.59,3962.6 v1(2814.96,3966.54) ; 2801.18,4316.93 v1(2814.96,4320.87) ; 2801.18,4316.93 v1(2814.96,4320.87) ; 2801.18,4316.93 v1(2814.96,4320.87) ; 2801.18,4316.93 2778.49,4305.09 v1(2814.96,4320.87) ; 2801.18,4316.93 2778.49,4328.76 v1(2814.96,4320.87) ; 2801.18,4316.93 2775.59,4316.93 v1(2814.96,4320.87) ; 2801.18,4671.26 2775.59,4671.26 v1(2814.96,4675.2) ; 2801.18,4671.26 2778.49,4683.09 v1(2814.96,4675.2) ; 2801.18,4671.26 2778.49,4659.43 v1(2814.96,4675.2) ; 2801.18,4671.26 v1(2814.96,4675.2) ; 2801.18,4671.26 v1(2814.96,4675.2) ; 2801.18,4671.26 v1(2814.96,4675.2) ; 2929.13,1476.38 2963.58,1487.2 ; 2929.13,1476.38 2952.76,1476.38 ; 2929.13,1476.38 2952.76,1476.38 ; 2929.13,1555.12 2963.58,1544.29 ; 2929.13,1555.12 2952.76,1555.12 ; 2929.13,1555.12 2952.76,1555.12 ; 2929.13,2185.04 2952.76,2185.04 ; 2929.13,2185.04 2952.76,2185.04 ; 2929.13,2185.04 2963.58,2195.87 ; 2929.13,2263.78 2952.76,2263.78 ; 2929.13,2263.78 2952.76,2263.78 ; 2929.13,2263.78 2963.58,2252.95 ; 2929.13,2539.37 2963.58,2550.2 ; 2929.13,2539.37 2952.76,2539.37 ; 2929.13,2539.37 2952.76,2539.37 ; 2929.13,2618.11 2963.58,2607.28 ; 2929.13,2618.11 2952.76,2618.11 ; 2929.13,2618.11 2952.76,2618.11 ; 2929.13,2893.7 2952.76,2893.7 ; 2929.13,2893.7 2952.76,2893.7 ; 2929.13,2893.7 2963.58,2904.53 ; 2929.13,2972.44 2952.76,2972.44 ; 2929.13,2972.44 2952.76,2972.44 ; 2929.13,2972.44 2963.58,2961.61 ; 2929.13,3248.03 2963.58,3258.86 ; 2929.13,3248.03 2952.76,3248.03 ; 2929.13,3248.03 2952.76,3248.03 ; 2929.13,3326.77 2963.58,3315.94 ; 2929.13,3326.77 2952.76,3326.77 ; 2929.13,3326.77 2952.76,3326.77 ; 2929.13,3602.36 2963.58,3613.19 ; 2929.13,3602.36 2952.76,3602.36 ; 2929.13,3602.36 2952.76,3602.36 ; 2929.13,3681.1 2963.58,3670.28 ; 2929.13,3681.1 2952.76,3681.1 ; 2929.13,3681.1 2952.76,3681.1 ; 2929.13,3956.69 2952.76,3956.69 ; 2929.13,3956.69 2952.76,3956.69 ; 2929.13,3956.69 2963.58,3967.52 ; 2929.13,4035.43 2952.76,4035.43 ; 2929.13,4035.43 2952.76,4035.43 ; 2929.13,4035.43 2963.58,4024.61 ; 2929.13,4311.02 2952.76,4311.02 ; 2929.13,4311.02 2952.76,4311.02 ; 2929.13,4311.02 2963.58,4321.85 ; 2929.13,4389.76 2952.76,4389.76 ; 2929.13,4389.76 2952.76,4389.76 ; 2929.13,4389.76 2963.58,4378.94 ; 2929.13,4665.35 2963.58,4676.18 ; 2929.13,4665.35 2952.76,4665.35 ; 2929.13,4665.35 2952.76,4665.35 ; 2929.13,4744.09 2963.58,4733.27 ; 2929.13,4744.09 2952.76,4744.09 ; 2929.13,4744.09 2952.76,4744.09 ; 2952.76,1476.38 2963.58,1487.2 ; 2952.76,1476.38 2932.28,1488.15 2952.76,1476.38 ; 2952.76,1476.38 2932.28,1464.61 2952.76,1476.38 ; 2952.76,1555.12 2963.58,1544.29 ; 2952.76,1555.12 2932.28,1566.89 2952.76,1555.12 ; 2952.76,1555.12 2932.28,1543.35 2952.76,1555.12 ; 2952.76,2185.04 2932.28,2173.27 2952.76,2185.04 ; 2952.76,2185.04 2932.28,2196.81 2952.76,2185.04 ; 2952.76,2185.04 2963.58,2195.87 ; 2952.76,2263.78 2932.28,2252.01 2952.76,2263.78 ; 2952.76,2263.78 2932.28,2275.55 2952.76,2263.78 ; 2952.76,2263.78 2963.58,2252.95 ; 2952.76,2539.37 2963.58,2550.2 ; 2952.76,2539.37 2932.28,2551.14 2952.76,2539.37 ; 2952.76,2539.37 2932.28,2527.6 2952.76,2539.37 ; 2952.76,2618.11 2963.58,2607.28 ; 2952.76,2618.11 2932.28,2629.88 2952.76,2618.11 ; 2952.76,2618.11 2932.28,2606.34 2952.76,2618.11 ; 2952.76,2893.7 2932.28,2881.93 2952.76,2893.7 ; 2952.76,2893.7 2932.28,2905.47 2952.76,2893.7 ; 2952.76,2893.7 2963.58,2904.53 ; 2952.76,2972.44 2932.28,2960.67 2952.76,2972.44 ; 2952.76,2972.44 2932.28,2984.21 2952.76,2972.44 ; 2952.76,2972.44 2963.58,2961.61 ; 2952.76,3248.03 2963.58,3258.86 ; 2952.76,3248.03 2932.28,3259.8 2952.76,3248.03 ; 2952.76,3248.03 2932.28,3236.26 2952.76,3248.03 ; 2952.76,3326.77 2963.58,3315.94 ; 2952.76,3326.77 2932.28,3338.54 2952.76,3326.77 ; 2952.76,3326.77 2932.28,3315 2952.76,3326.77 ; 2952.76,3602.36 2963.58,3613.19 ; 2952.76,3602.36 2932.28,3614.13 2952.76,3602.36 ; 2952.76,3602.36 2932.28,3590.59 2952.76,3602.36 ; 2952.76,3681.1 2963.58,3670.28 ; 2952.76,3681.1 2932.28,3692.88 2952.76,3681.1 ; 2952.76,3681.1 2932.28,3669.33 2952.76,3681.1 ; 2952.76,3956.69 2932.28,3944.92 2952.76,3956.69 ; 2952.76,3956.69 2932.28,3968.47 2952.76,3956.69 ; 2952.76,3956.69 2963.58,3967.52 ; 2952.76,4035.43 2932.28,4023.66 2952.76,4035.43 ; 2952.76,4035.43 2932.28,4047.21 2952.76,4035.43 ; 2952.76,4035.43 2963.58,4024.61 ; 2952.76,4311.02 2932.28,4299.25 2952.76,4311.02 ; 2952.76,4311.02 2932.28,4322.8 2952.76,4311.02 ; 2952.76,4311.02 2963.58,4321.85 ; 2952.76,4389.76 2932.28,4377.99 2952.76,4389.76 ; 2952.76,4389.76 2932.28,4401.54 2952.76,4389.76 ; 2952.76,4389.76 2963.58,4378.94 ; 2952.76,4665.35 2963.58,4676.18 ; 2952.76,4665.35 2932.28,4677.13 2952.76,4665.35 ; 2952.76,4665.35 2932.28,4653.58 2952.76,4665.35 ; 2952.76,4744.09 2963.58,4733.27 ; 2952.76,4744.09 2932.28,4755.87 2952.76,4744.09 ; 2952.76,4744.09 2932.28,4732.32 2952.76,4744.09 ; 3176.18,1487.2 3188.98,1500 3188.98,1539.37 3198.82,1549.21 ; 3176.18,2195.87 3188.98,2208.66 3188.98,2248.03 3198.82,2257.87 ; 3176.18,2550.2 3188.98,2562.99 3188.98,2602.36 3198.82,2612.2 ; 3176.18,2904.53 3188.98,2917.32 3188.98,2956.69 3198.82,2966.54 ; 3176.18,3258.86 3188.98,3271.65 3188.98,3311.02 3198.82,3320.87 ; 3176.18,3613.19 3188.98,3625.98 3188.98,3665.35 3198.82,3675.2 ; 3176.18,3967.52 3188.98,3980.31 3188.98,4019.68 3198.82,4029.53 ; 3176.18,4321.85 3188.98,4334.65 3188.98,4374.02 3198.82,4383.86 ; 3176.18,4676.18 3188.98,4688.98 3188.98,4728.35 3198.82,4738.19 ; 3198.82,1549.21 3228.35,1549.21 3198.82,1549.21 ; 3198.82,2257.87 3228.35,2257.87 3198.82,2257.87 ; 3198.82,2612.2 3228.35,2612.2 3198.82,2612.2 ; 3198.82,2966.54 3228.35,2966.54 3198.82,2966.54 ; 3198.82,3320.87 3228.35,3320.87 3198.82,3320.87 ; 3198.82,3675.2 3228.35,3675.2 3198.82,3675.2 ; 3198.82,4029.53 3228.35,4029.53 3198.82,4029.53 ; 3198.82,4383.86 3228.35,4383.86 3198.82,4383.86 ; 3198.82,4738.19 3228.35,4738.19 3198.82,4738.19 ; 3228.35,1482.28 3253.94,1482.28 ; 3228.35,1482.28 3253.94,1482.28 ; 3228.35,1482.28 v1(3267.72,1486.22) ; 3228.35,1482.28 v1(3267.72,1486.22) ; 3228.35,2190.94 v1(3267.72,2194.88) ; 3228.35,2190.94 v1(3267.72,2194.88) ; 3228.35,2190.94 3253.94,2190.94 ; 3228.35,2190.94 3253.94,2190.94 ; 3228.35,2545.28 3253.94,2545.28 ; 3228.35,2545.28 3253.94,2545.28 ; 3228.35,2545.28 v1(3267.72,2549.21) ; 3228.35,2545.28 v1(3267.72,2549.21) ; 3228.35,2899.61 v1(3267.72,2903.54) ; 3228.35,2899.61 v1(3267.72,2903.54) ; 3228.35,2899.61 3253.94,2899.61 ; 3228.35,2899.61 3253.94,2899.61 ; 3228.35,3253.94 3253.94,3253.94 ; 3228.35,3253.94 3253.94,3253.94 ; 3228.35,3253.94 v1(3267.72,3257.87) ; 3228.35,3253.94 v1(3267.72,3257.87) ; 3228.35,3608.27 3253.94,3608.27 ; 3228.35,3608.27 3253.94,3608.27 ; 3228.35,3608.27 v1(3267.72,3612.2) ; 3228.35,3608.27 v1(3267.72,3612.2) ; 3228.35,3962.6 v1(3267.72,3966.54) ; 3228.35,3962.6 v1(3267.72,3966.54) ; 3228.35,3962.6 3253.94,3962.6 ; 3228.35,3962.6 3253.94,3962.6 ; 3228.35,4316.93 v1(3267.72,4320.87) ; 3228.35,4316.93 v1(3267.72,4320.87) ; 3228.35,4316.93 3253.94,4316.93 ; 3228.35,4316.93 3253.94,4316.93 ; 3228.35,4671.26 3253.94,4671.26 ; 3228.35,4671.26 3253.94,4671.26 ; 3228.35,4671.26 v1(3267.72,4675.2) ; 3228.35,4671.26 v1(3267.72,4675.2) ; 3231.25,1470.45 3253.94,1482.28 ; 3231.25,1470.45 3253.94,1482.28 ; 3231.25,1470.45 v1(3267.72,1486.22) ; 3231.25,1470.45 v1(3267.72,1486.22) ; 3231.25,1494.12 3253.94,1482.28 ; 3231.25,1494.12 3253.94,1482.28 ; 3231.25,1494.12 v1(3267.72,1486.22) ; 3231.25,1494.12 v1(3267.72,1486.22) ; 3231.25,2179.11 v1(3267.72,2194.88) ; 3231.25,2179.11 v1(3267.72,2194.88) ; 3231.25,2179.11 3253.94,2190.94 ; 3231.25,2179.11 3253.94,2190.94 ; 3231.25,2202.78 v1(3267.72,2194.88) ; 3231.25,2202.78 v1(3267.72,2194.88) ; 3231.25,2202.78 3253.94,2190.94 ; 3231.25,2202.78 3253.94,2190.94 ; 3231.25,2533.44 3253.94,2545.28 ; 3231.25,2533.44 3253.94,2545.28 ; 3231.25,2533.44 v1(3267.72,2549.21) ; 3231.25,2533.44 v1(3267.72,2549.21) ; 3231.25,2557.11 3253.94,2545.28 ; 3231.25,2557.11 3253.94,2545.28 ; 3231.25,2557.11 v1(3267.72,2549.21) ; 3231.25,2557.11 v1(3267.72,2549.21) ; 3231.25,2887.77 v1(3267.72,2903.54) ; 3231.25,2887.77 v1(3267.72,2903.54) ; 3231.25,2887.77 3253.94,2899.61 ; 3231.25,2887.77 3253.94,2899.61 ; 3231.25,2911.44 v1(3267.72,2903.54) ; 3231.25,2911.44 v1(3267.72,2903.54) ; 3231.25,2911.44 3253.94,2899.61 ; 3231.25,2911.44 3253.94,2899.61 ; 3231.25,3242.1 3253.94,3253.94 ; 3231.25,3242.1 3253.94,3253.94 ; 3231.25,3242.1 v1(3267.72,3257.87) ; 3231.25,3242.1 v1(3267.72,3257.87) ; 3231.25,3265.77 3253.94,3253.94 ; 3231.25,3265.77 3253.94,3253.94 ; 3231.25,3265.77 v1(3267.72,3257.87) ; 3231.25,3265.77 v1(3267.72,3257.87) ; 3231.25,3596.43 3253.94,3608.27 ; 3231.25,3596.43 3253.94,3608.27 ; 3231.25,3596.43 v1(3267.72,3612.2) ; 3231.25,3596.43 v1(3267.72,3612.2) ; 3231.25,3620.1 3253.94,3608.27 ; 3231.25,3620.1 3253.94,3608.27 ; 3231.25,3620.1 v1(3267.72,3612.2) ; 3231.25,3620.1 v1(3267.72,3612.2) ; 3231.25,3950.76 v1(3267.72,3966.54) ; 3231.25,3950.76 v1(3267.72,3966.54) ; 3231.25,3950.76 3253.94,3962.6 ; 3231.25,3950.76 3253.94,3962.6 ; 3231.25,3974.43 v1(3267.72,3966.54) ; 3231.25,3974.43 v1(3267.72,3966.54) ; 3231.25,3974.43 3253.94,3962.6 ; 3231.25,3974.43 3253.94,3962.6 ; 3231.25,4305.09 v1(3267.72,4320.87) ; 3231.25,4305.09 v1(3267.72,4320.87) ; 3231.25,4305.09 3253.94,4316.93 ; 3231.25,4305.09 3253.94,4316.93 ; 3231.25,4328.76 v1(3267.72,4320.87) ; 3231.25,4328.76 v1(3267.72,4320.87) ; 3231.25,4328.76 3253.94,4316.93 ; 3231.25,4328.76 3253.94,4316.93 ; 3231.25,4659.43 3253.94,4671.26 ; 3231.25,4659.43 3253.94,4671.26 ; 3231.25,4659.43 v1(3267.72,4675.2) ; 3231.25,4659.43 v1(3267.72,4675.2) ; 3231.25,4683.09 3253.94,4671.26 ; 3231.25,4683.09 3253.94,4671.26 ; 3231.25,4683.09 v1(3267.72,4675.2) ; 3231.25,4683.09 v1(3267.72,4675.2) ; 3253.94,1482.28 v1@3257.87,1486.22 ; 3253.94,1482.28 v1(3267.72,1486.22) ; 3253.94,1482.28 v1(3267.72,1486.22) ; 3253.94,1482.28 v1(3267.72,1486.22) ; 3253.94,1482.28 v1(3267.72,1486.22) ; 3253.94,1482.28 v1(3267.72,1486.22) ; 3253.94,1482.28 v1(3267.72,1486.22) ; 3253.94,1482.28 v1(3267.72,1486.22) ; 3253.94,2190.94 v1(3267.72,2194.88) ; 3253.94,2190.94 v1(3267.72,2194.88) ; 3253.94,2190.94 v1(3267.72,2194.88) ; 3253.94,2190.94 v1(3267.72,2194.88) ; 3253.94,2190.94 v1(3267.72,2194.88) ; 3253.94,2190.94 v1(3267.72,2194.88) ; 3253.94,2190.94 v1(3267.72,2194.88) ; 3253.94,2190.94 v1@3257.87,2194.88 ; 3253.94,2545.28 v1@3257.87,2549.21 ; 3253.94,2545.28 v1(3267.72,2549.21) ; 3253.94,2545.28 v1(3267.72,2549.21) ; 3253.94,2545.28 v1(3267.72,2549.21) ; 3253.94,2545.28 v1(3267.72,2549.21) ; 3253.94,2545.28 v1(3267.72,2549.21) ; 3253.94,2545.28 v1(3267.72,2549.21) ; 3253.94,2545.28 v1(3267.72,2549.21) ; 3253.94,2899.61 v1(3267.72,2903.54) ; 3253.94,2899.61 v1(3267.72,2903.54) ; 3253.94,2899.61 v1(3267.72,2903.54) ; 3253.94,2899.61 v1(3267.72,2903.54) ; 3253.94,2899.61 v1(3267.72,2903.54) ; 3253.94,2899.61 v1(3267.72,2903.54) ; 3253.94,2899.61 v1(3267.72,2903.54) ; 3253.94,2899.61 v1@3257.87,2903.54 ; 3253.94,3253.94 v1@3257.87,3257.87 ; 3253.94,3253.94 v1(3267.72,3257.87) ; 3253.94,3253.94 v1(3267.72,3257.87) ; 3253.94,3253.94 v1(3267.72,3257.87) ; 3253.94,3253.94 v1(3267.72,3257.87) ; 3253.94,3253.94 v1(3267.72,3257.87) ; 3253.94,3253.94 v1(3267.72,3257.87) ; 3253.94,3253.94 v1(3267.72,3257.87) ; 3253.94,3608.27 v1@3257.87,3612.2 ; 3253.94,3608.27 v1(3267.72,3612.2) ; 3253.94,3608.27 v1(3267.72,3612.2) ; 3253.94,3608.27 v1(3267.72,3612.2) ; 3253.94,3608.27 v1(3267.72,3612.2) ; 3253.94,3608.27 v1(3267.72,3612.2) ; 3253.94,3608.27 v1(3267.72,3612.2) ; 3253.94,3608.27 v1(3267.72,3612.2) ; 3253.94,3962.6 v1(3267.72,3966.54) ; 3253.94,3962.6 v1(3267.72,3966.54) ; 3253.94,3962.6 v1(3267.72,3966.54) ; 3253.94,3962.6 v1(3267.72,3966.54) ; 3253.94,3962.6 v1(3267.72,3966.54) ; 3253.94,3962.6 v1(3267.72,3966.54) ; 3253.94,3962.6 v1(3267.72,3966.54) ; 3253.94,3962.6 v1@3257.87,3966.54 ; 3253.94,4316.93 v1(3267.72,4320.87) ; 3253.94,4316.93 v1(3267.72,4320.87) ; 3253.94,4316.93 v1(3267.72,4320.87) ; 3253.94,4316.93 v1(3267.72,4320.87) ; 3253.94,4316.93 v1(3267.72,4320.87) ; 3253.94,4316.93 v1(3267.72,4320.87) ; 3253.94,4316.93 v1(3267.72,4320.87) ; 3253.94,4316.93 v1@3257.87,4320.87 ; 3253.94,4671.26 v1@3257.87,4675.2 ; 3253.94,4671.26 v1(3267.72,4675.2) ; 3253.94,4671.26 v1(3267.72,4675.2) ; 3253.94,4671.26 v1(3267.72,4675.2) ; 3253.94,4671.26 v1(3267.72,4675.2) ; 3253.94,4671.26 v1(3267.72,4675.2) ; 3253.94,4671.26 v1(3267.72,4675.2) ; 3253.94,4671.26 v1(3267.72,4675.2) ; v1@3257.87,1486.22 v1(3267.72,1486.22) ; v1@3257.87,1486.22 3230.06,1496.32 v1(3267.72,1486.22) ; v1@3257.87,1486.22 3231.64,1472.52 v1(3267.72,1486.22) ; v1@3257.87,1486.22 3228.35,1484.25 v1(3267.72,1486.22) ; v1@3257.87,2194.88 3228.35,2192.91 v1(3267.72,2194.88) ; v1@3257.87,2194.88 3231.64,2181.18 v1(3267.72,2194.88) ; v1@3257.87,2194.88 3230.06,2204.98 v1(3267.72,2194.88) ; v1@3257.87,2194.88 v1(3267.72,2194.88) ; v1@3257.87,2549.21 v1(3267.72,2549.21) ; v1@3257.87,2549.21 3230.06,2559.31 v1(3267.72,2549.21) ; v1@3257.87,2549.21 3231.64,2535.51 v1(3267.72,2549.21) ; v1@3257.87,2549.21 3228.35,2547.24 v1(3267.72,2549.21) ; v1@3257.87,2903.54 3228.35,2901.57 v1(3267.72,2903.54) ; v1@3257.87,2903.54 3231.64,2889.84 v1(3267.72,2903.54) ; v1@3257.87,2903.54 3230.06,2913.64 v1(3267.72,2903.54) ; v1@3257.87,2903.54 v1(3267.72,2903.54) ; v1@3257.87,3257.87 v1(3267.72,3257.87) ; v1@3257.87,3257.87 3230.06,3267.97 v1(3267.72,3257.87) ; v1@3257.87,3257.87 3231.64,3244.17 v1(3267.72,3257.87) ; v1@3257.87,3257.87 3228.35,3255.91 v1(3267.72,3257.87) ; v1@3257.87,3612.2 v1(3267.72,3612.2) ; v1@3257.87,3612.2 3230.06,3622.3 v1(3267.72,3612.2) ; v1@3257.87,3612.2 3231.64,3598.51 v1(3267.72,3612.2) ; v1@3257.87,3612.2 3228.35,3610.24 v1(3267.72,3612.2) ; v1@3257.87,3966.54 3228.35,3964.57 v1(3267.72,3966.54) ; v1@3257.87,3966.54 3231.64,3952.84 v1(3267.72,3966.54) ; v1@3257.87,3966.54 3230.06,3976.63 v1(3267.72,3966.54) ; v1@3257.87,3966.54 v1(3267.72,3966.54) ; v1@3257.87,4320.87 3228.35,4318.9 v1(3267.72,4320.87) ; v1@3257.87,4320.87 3231.64,4307.17 v1(3267.72,4320.87) ; v1@3257.87,4320.87 3230.06,4330.96 v1(3267.72,4320.87) ; v1@3257.87,4320.87 v1(3267.72,4320.87) ; v1@3257.87,4675.2 v1(3267.72,4675.2) ; v1@3257.87,4675.2 3230.06,4685.29 v1(3267.72,4675.2) ; v1@3257.87,4675.2 3231.64,4661.5 v1(3267.72,4675.2) ; v1@3257.87,4675.2 3228.35,4673.23 v1(3267.72,4675.2)